# EAGLE board Micromuse 3D Design (EAGLE 9.7.0)
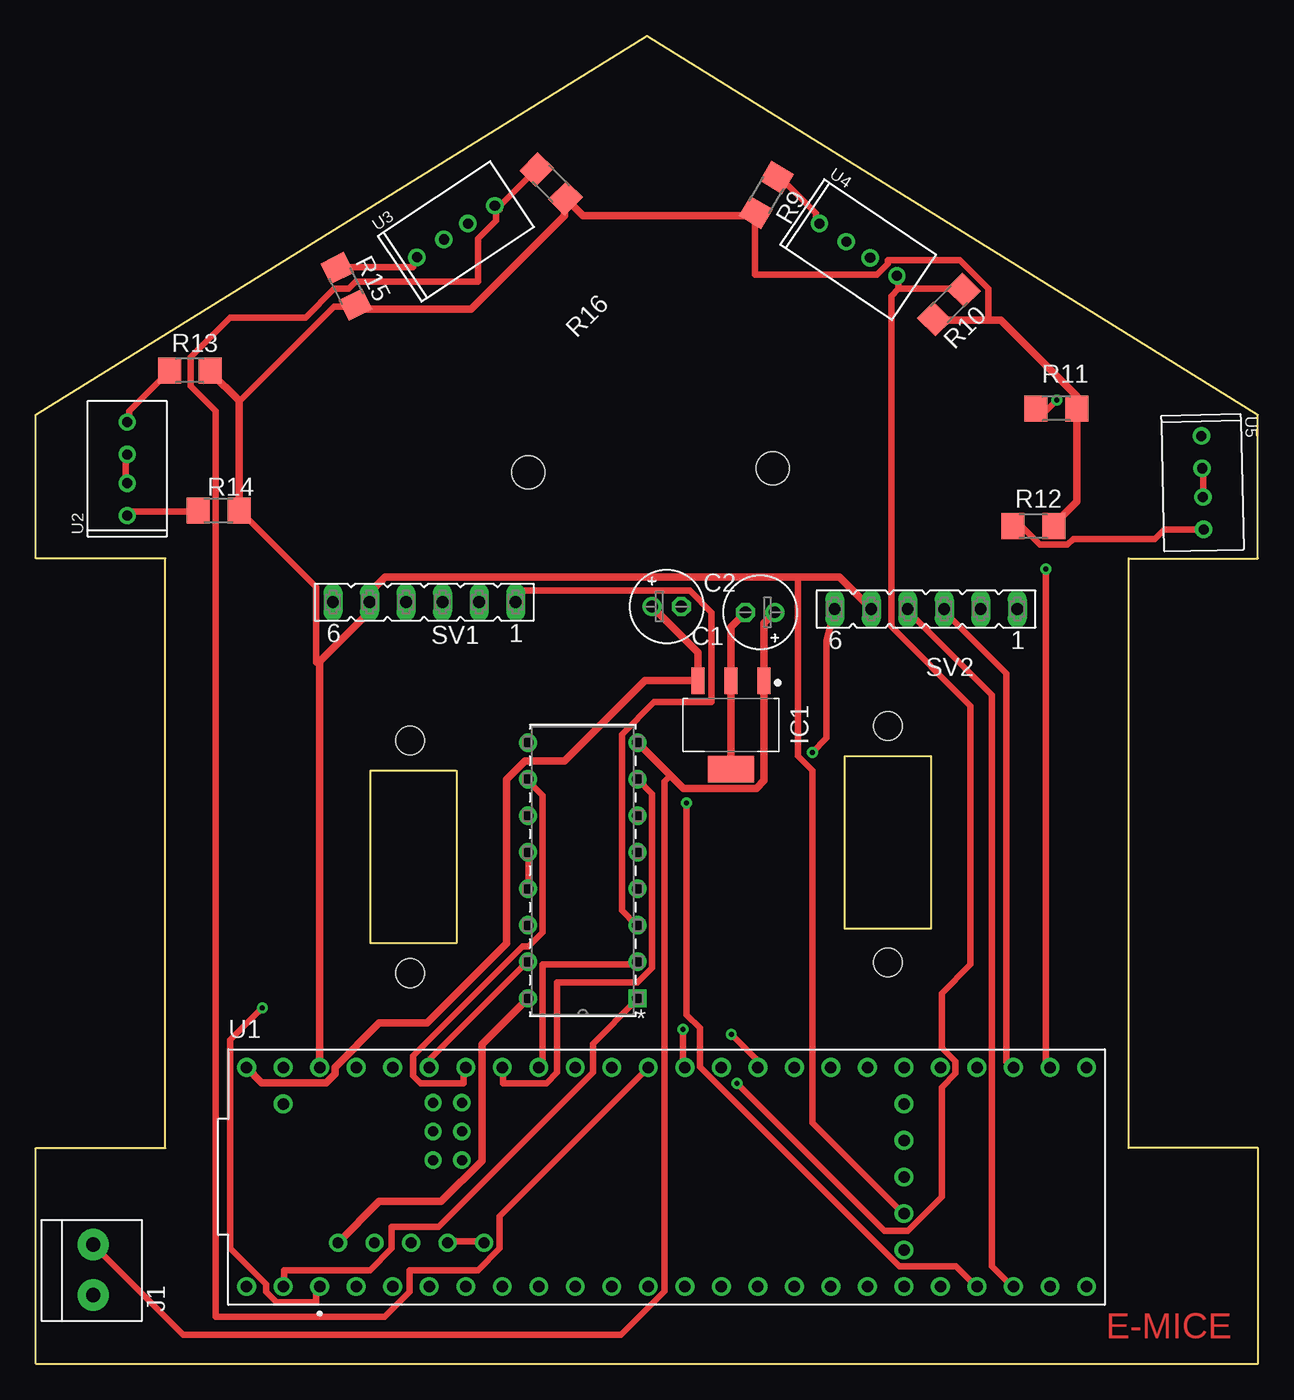
[diagram p0: board, top side]
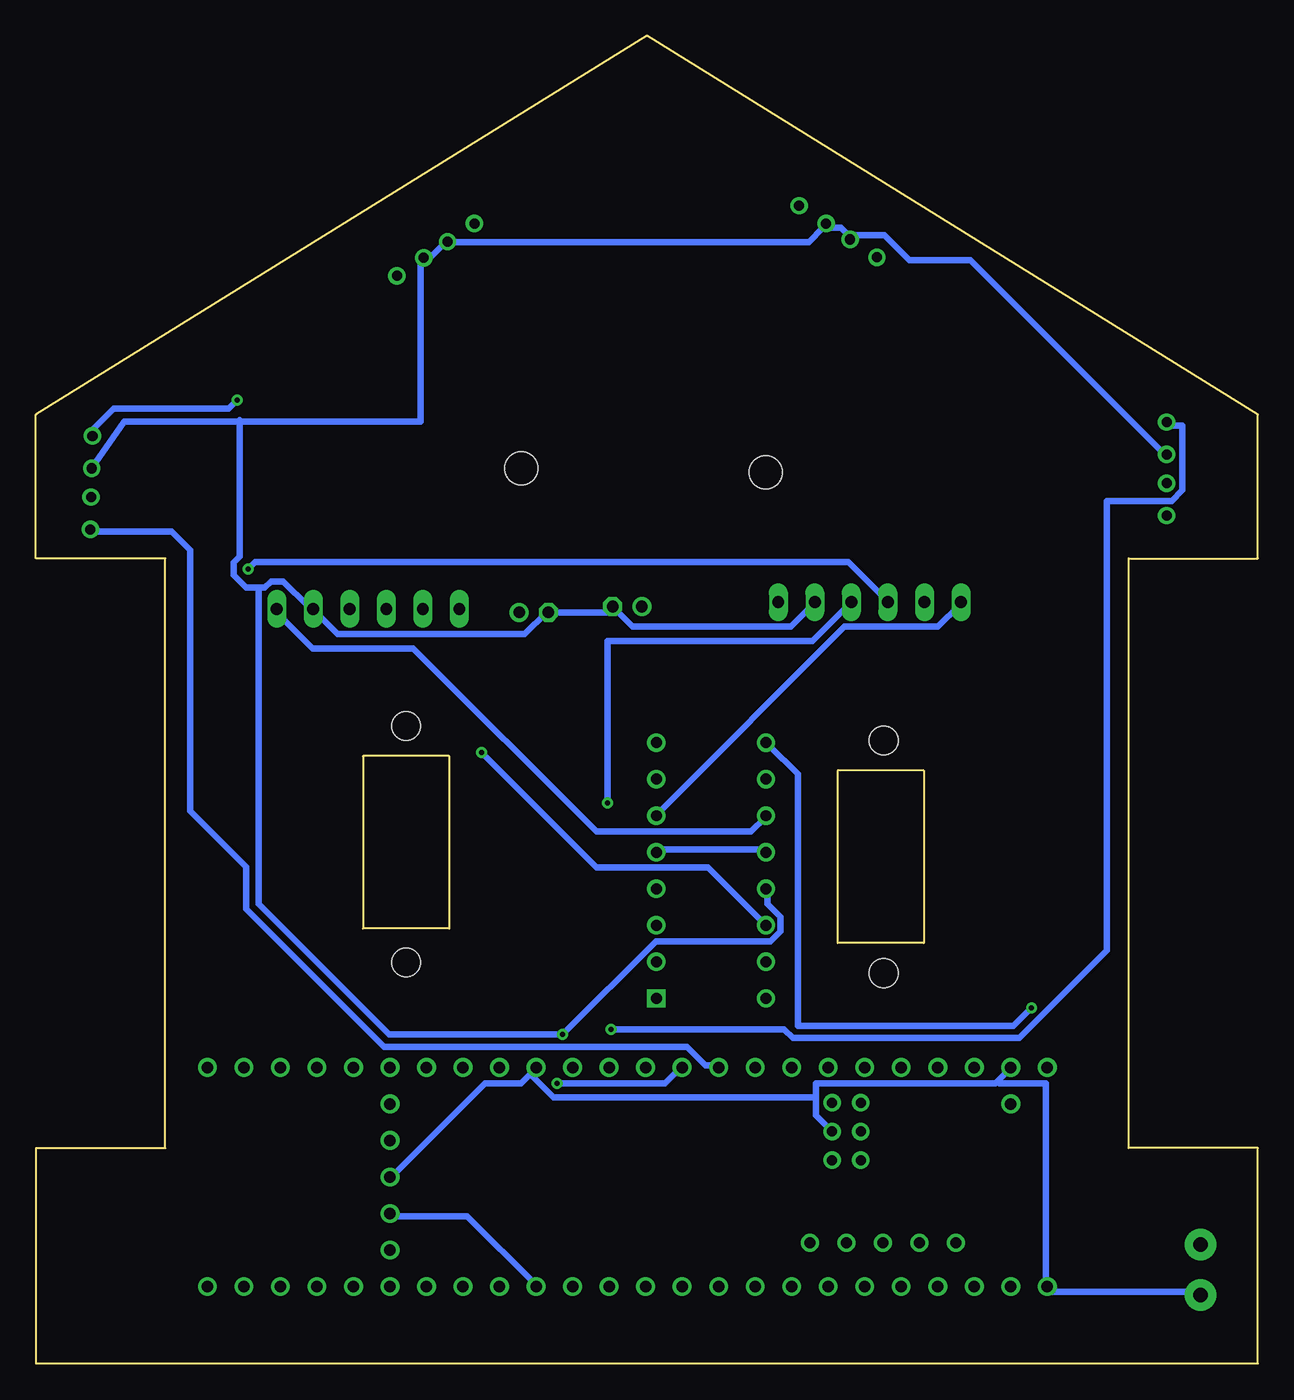
[diagram p1: board, bottom side, seen from below]

Size 85 x 92.34 mm. Coordinates in mm from the lower left corner, seen from the top.
Outline: 0,0 85,0 85,15 76,15 76,56 85,56 85,66 42.5,92.34 0,66 0,56 9,56 9,15 0,15 0,0
Outline: 23.25,41.25 23.25,29.25 29.25,29.25 29.25,41.25 23.25,41.25
Outline: 56.25,42.25 56.25,30.25 62.25,30.25 62.25,42.25 56.25,42.25
Copper layers (1*16): Top / Bottom
Stack-up Default Layer Stack: Top User Defined 0.035mm / Dielectric-1 User Defined 1.5mm / Bottom User Defined 0.035mm
Design rules: minimum drill size 0.35mm, minimum copper width 18mil, keepout clearance 0mil, drill distance 6mil, via restrict clearance 0mil, dimension clearance 40mil, restrict clearance 0mil, copper clearance wire_polygon to wire_polygon 16mil, copper clearance wire_polygon to pad_smd 6mil, copper clearance wire_polygon to via 6mil, copper clearance pad_smd to pad_smd 6mil, copper clearance pad_smd to via 6mil, copper clearance via to via 6mil, copper clearance smd to pad (same net) 6mil, copper clearance smd to via (same net) 6mil, copper clearance smd to smd (same net) 6mil
Holes 2 mm at 26.03,43.34 26.03,27.16 59.25,44.34 59.25,27.91
Holes 2.3 mm at 51.25,62.25 34.26,61.99

## Footprints (pad centres in the part's own frame; a part is rotated, then mirrored left to right if it is on the bottom)
E2-5 = drill 0.813 pad 1.27: + -1.016,0 | drill 0.813 pad 1.27 octagon: - 1.016,0
POWERDIP-16_STM = drill 0.762 pad 1.27 square: 1 0,0 | drill 0.762 pad 1.27: 2 0,-2.54; 3 0,-5.08; 4 0,-7.62; 5 0,-10.16; 6 0,-12.7; 7 0,-15.24; 8 0,-17.78; 9 7.62,-17.78; 10 7.62,-15.24; 11 7.62,-12.7; 12 7.62,-10.16; 13 7.62,-7.62; 14 7.62,-5.08; 15 7.62,-2.54; 16 7.62,0
SOT230P700X170-4 = smd 1.86 x 0.898: 1 -3.075,2.3; 2 -3.075,0; 3 -3.075,-2.3 | smd 1.86 x 3.189: 4 3.075,0
1X2-3.5MM = drill 1 pad 2.184: 1 1.8,0; 2 -1.7,0
R1206 = smd 1.6 x 1.803: 1 -1.422,0; 2 1.422,0
FE06 = drill 0.813 long: 1 -6.35,0; 2 -3.81,0; 3 -1.27,0; 4 1.27,0; 5 3.81,0; 6 6.35,0
MODULE_DEV-16771 = drill 0.8: 0 -26.67,-7.62; 1 -24.13,-7.62; 2 -21.59,-7.62; 3 -19.05,-7.62; 3.3V_1 6.35,-7.62; 3.3V_2 -24.13,7.62; 3.3V_3 16.51,-2.54; 4 -16.51,-7.62; 5 -13.97,-7.62; 6 -11.43,-7.62; 7 -8.89,-7.62; 8 -6.35,-7.62; 9 -3.81,-7.62; 10 -1.27,-7.62; 11 1.27,-7.62; 12 3.81,-7.62; 13 3.81,7.62; 14 1.27,7.62; 15 -1.27,7.62; 16 -3.81,7.62; 17 -6.35,7.62; 18 -8.89,7.62; 19 -11.43,7.62; 20 -13.97,7.62; 21 -16.51,7.62; 22 -19.05,7.62; 23 -21.59,7.62; 24 8.89,-7.62; 25 11.43,-7.62; 26 13.97,-7.62; 27 16.51,-7.62; 28 19.05,-7.62; 29 21.59,-7.62; 30 24.13,-7.62; 31 26.67,-7.62; 32 29.21,-7.62; 33 29.21,7.62; 34 26.67,7.62; 35 24.13,7.62; 36 21.59,7.62; 37 19.05,7.62; 38 16.51,7.62; 39 13.97,7.62; 40 11.43,7.62; 41 8.89,7.62; GND1 -29.21,-7.62; GND2 6.35,7.62; GND3 -26.67,7.62; GND4 16.51,0; ON/OFF 16.51,5.08; PROGRAM 16.51,2.54; VBAT 16.51,-5.08; VIN -29.21,7.62; VUSB -26.67,5.08 | drill 0.75: 5V -22.86,-4.57; D+ -17.78,-4.57; D- -20.32,-4.57; USB_GND1 -15.24,-4.57; USB_GND2 -12.7,-4.57 | drill 0.7: GND5 -14.24,3.17; LED -16.24,3.17; R+ -16.24,5.17; R- -14.24,5.17; T+ -14.24,1.17; T- -16.24,1.17
ST188-B = drill 0.7: A -3.25,0; C 3.25,0; E 1,0; K -1,0

## Placement (x,y rotation side)
C1  [E2-5]  50.37,52.25 180 top
C2  [E2-5]  43.87,52.65 0 top
CR1  L293DPOWERDIP-16_STM  [POWERDIP-16_STM]  41.85,25.41 180 top
IC1  LM7805_SOT223  [SOT230P700X170-4]  48.34,44.42 270 top
J1  1X2-3.5MM  [1X2-3.5MM]  3.98,6.58 270 top
R9  [R1206]  50.8,81.28 239.1 top
R10  [R1206]  63.5,73.66 225 top
R11  [R1206]  70.98,66.43 0 top
R12  [R1206]  69.37,58.24 0 top
R13  [R1206]  10.71,69.07 0 top
R14  [R1206]  12.7,59.32 0 top
R15  [R1206]  21.59,74.93 296.5 top
R16  [R1206]  35.83,82.05 315 top
SV1  [FE06]  27.01,52.96 180 top
SV2  [FE06]  61.91,52.48 180 top
U1  DEV-16771  [MODULE_DEV-16771]  43.87,12.98 0 top
U2  ST188B  [ST188-B]  6.35,62.23 90 top
U3  ST188B  [ST188-B]  29.21,78.74 33.6 top
U4  ST188B  [ST188-B]  57.19,77.47 326 top
U5  ST188B  [ST188-B]  81.14,61.27 271.3 top

## Library data of the parts
C1 C2 = rcl; SPICEPREFIX: C
CR1 = 2024-05-25_23-34-21_Library; COPYRIGHT: Copyright (C) 2024 Ultra Librarian. All rights reserved.; MANUFACTURER_PART_NUMBER: L293D; MFR_NAME: STMicroelectronics
IC1 = IC_Power-Management; CATEGORY: IC_Logic; DESCRIPTION: 5V Voltage Regulator; MANUFACTURER: Generic; MPN: Generic; SERIES: LM7805; SUB-CATEGORY: Voltage Regulator; TYPE: 5V
J1 = adafruit
R9-R16 = rcl; SPICEPREFIX: R
SV1 SV2 = con-lsta; OC_FARNELL: unknown; OC_NEWARK: unknown
U1 = DEV-16771; AVAILABILITY: In Stock; CHECK_PRICES: https://www.snapeda.com/parts/DEV-16771/SparkFun+Electronics/view-part/?ref=eda; DESCRIPTION: RT1062 Teensy 4.1 series ARM® Cortex®-M7 MPU Embedded Evaluation Board; MF: SparkFun Electronics; MP: DEV-16771; PACKAGE: None; PRICE: None; SNAPEDA_LINK: https://www.snapeda.com/parts/DEV-16771/SparkFun+Electronics/view-part/?ref=snap
U2-U5 = ST188; AVAILABILITY: In Stock; CHECK_PRICES: https://www.snapeda.com/parts/ST188/Stackpole+Electronics+Inc./view-part/?ref=eda; DESCRIPTION: RES SMD 887K OHM 0.5% 1/16W 0402; MF: Stackpole Electronics Inc.; MP: ST188; PACKAGE: None; PRICE: None; SNAPEDA_LINK: https://www.snapeda.com/parts/ST188/Stackpole+Electronics+Inc./view-part/?ref=snap

## Nets
3.3V: R9.2 R10.2 R11.2 R12.2 R13.2 R14.2 R15.2 R16.2 SV1.5 SV2.5 U1.3.3V_1 U1.3.3V_2 U1.3.3V_3
5V: CR1.16 U1.5V
C1: SV1.3 U1.29
C2: SV1.4 U1.34
C3: SV2.3 U1.35
C4: SV2.4 U1.30
ENABLE1: CR1.1 U1.0
ENABLE2: CR1.9 U1.1
GND: C1.- C2.- CR1.5 CR1.12 CR1.13 IC1.2 IC1.4 J1.1 SV1.2 SV2.2 U1.GND1 U1.GND2 U1.GND3 U1.GND4 U1.GND5 U2.E U2.K U3.E U3.K U4.E U4.K U5.E U5.K
IN_1: CR1.2 U1.18
IN_2: CR1.7 U1.19
IN_3: CR1.10 U1.20
IN_4: CR1.15 U1.21
IR_1: R13.1 U1.14 U2.C
IR_2: R16.1 U1.15 U3.C
IR_3: R10.1 U1.16 U4.C
IR_4: R12.1 U1.17 U5.C
MCU_POWER: C2.+ IC1.3 U1.VIN
MOTOR_POWER: C1.+ CR1.8 IC1.1 J1.2
N$1: R14.1 U2.A
N$2: R15.1 U3.A
N$3: R9.1 U4.A
N$4: R11.1 U5.A
N$8: CR1.4
OUT_1: CR1.3 SV1.1
OUT_2: CR1.6 SV1.6
OUT_3: CR1.11 SV2.1
OUT_4: CR1.14 SV2.6
USB_GND: U1.USB_GND1 U1.USB_GND2

## Tracks (layer width: path | path; a pad name or v marks a point on that pad's centre or on a via)
3.3V
  Top 0.457: R14.2 14.25,59.25 19.5,54 19.5,48.75 19.73,48.75 | 14.12,66.98 14.25,67 20.75,73.5 22,73.5 R15.2 | 53,54.69 53,42.25 54,41.25 54,16.75 60.25,10.5 U1.3.3V_3 | 66.25,72.58 66.25,74.75 64.25,76.75 59.25,76.75 59.25,76.5 58.5,75.75 50,75.75 50,79.75 R9.2
  Top 0.508: U1.3.3V_2 19.73,48.75 19.73,48.83 23.2,52.3 SV1.5 23.2,53.62 24.27,54.69 53,54.69 55.89,54.69 SV2.5 | R9.2 49.85,79.84 38.04,79.84 R16.2 | R10.2 62.57,72.58 66.25,72.58 67.11,72.58 72.41,67.28 R11.2 72.41,59.96 70.79,58.34 R12.2 | R16.2 36.76,80.97 36.76,79.84 30.27,73.34 22.54,73.34 R15.2 | R16.2 | R15.2 | R13.2 12.13,68.97 14.12,66.98 R14.2
  Bottom 0.457: U1.3.3V_1 50.25,5.5 55,10.25 60.25,10.25 U1.3.3V_3
5V
  Top 0.508: CR1.16 31.02,22.2 31.02,14.11 28.19,11.29 23.89,11.29 U1.5V
C1  (via drill 0.35)
  Top 0.457: v45.25,39 45.25,24.25 46.17,23.33 46.17,20.64 60.06,6.75 64,6.75 65.25,5.5 U1.29
  Bottom 0.457: v45.25,39 45.25,50.25 31,50.25 28.5,52.75 SV1.3
C2  (via drill 0.35)
  Top 0.457: v70.25,55.25 70.25,21 70.5,20.75 U1.34
  Bottom 0.457: v70.25,55.25 69.75,55.75 28.5,55.75 25.75,53 SV1.4
C3
  Top 0.457: U1.35 67.75,20.75 67.5,21 67.5,48 63.25,52.25 SV2.3
C4
  Top 0.457: U1.30 67.75,5.5 66.5,6.75 66.5,46.5 60.75,52.25 SV2.4
ENABLE1
  Top 0.457: CR1.1 41.75,25.25 38.75,22.25 38.75,20.25 28,9.5 24.75,9.5 24.75,8 23.25,6.5 17.25,6.5 17.25,5.5 U1.0
ENABLE2  (via drill 0.35)
  Top 0.457: v15.75,24.75 13.5,22.5 13.5,8 16,5.5 16,5 16.75,4.25 19.5,4.25 19.5,5.25 U1.1
  Bottom 0.457: v15.75,24.75 17,23.5 32,23.5 32,41 34,43 CR1.9
GND  (via drill 0.35)
  Top 0.457: U2.K 6.25,61.25 6.25,63 U2.E | CR1.13 34.25,33.25 34.25,35.5 CR1.12 | v48.36,22.89 50.52,20.73 U1.GND2 | U5.E 81.18,60.45 81.18,62.18 U5.K
  Top 0.508: C1.- 48.34,51.23 IC1.2 IC1.4
  Bottom 0.457: U1.GND4 60.25,13 53.75,19.5 51.25,19.5 50.25,20.5 U1.GND2 50.5,20 49,18.5 30.75,18.5 | J1.1 4,5 14.25,5 14.5,5.25 U1.GND1 14.75,5.5 14.75,19.5 18,19.5 18.12,19.62 | 30.75,18.5 30.75,19.5 18.25,19.5 18.12,19.62 | 30.75,18.5 30.75,17.25 29.75,16.25 U1.GND5 | 18.12,19.62 17.25,20.5 U1.GND3 | U2.E 6.5,63.25 20,76.75 24.25,76.75 26,78.5 28.25,78.5 U3.K 28.5,78.5 29,79 30,79 U3.E 30.25,79 31.25,78 56.25,78 U4.K 56.5,78 57.5,77 58,77 U4.E 58.25,76.75 58.25,65.5 70.81,65.5 | CR1.5 41.75,35.75 34.25,35.75 CR1.12 | SV1.2 31,52.75 32.5,51.25 43.5,51.25 44.75,52.5 C2.- 45,52.5 45.25,52.25 C1.- 49.5,52.25 51,50.75 64,50.75 65.5,52.25 SV2.2 66.06,52.68 67.79,54.41 68.66,54.41 69.09,53.98 69.52,53.98 | 70.81,65.5 78.86,65.5 U5.K | CR1.13 34.11,32.82 34.11,31.95 33.21,31.05 33.21,30.06 33.91,29.36 41.88,29.36 v48.36,22.89 60.43,22.89 69.52,31.98 69.52,53.98 | 70.81,65.5 70.81,56.13 71.25,55.7 71.25,54.84 70.38,53.98 69.52,53.98 | 70.81,65.63 70.81,65.5
IN_1
  Top 0.457: CR1.2 41.75,27.75 35.25,27.75 35.25,21 35,20.75 U1.18
IN_2
  Top 0.457: U1.19 32.5,20.5 32.5,19.5 35.5,19.5 36.25,20.25 36.25,26.5 41.84,26.5 42.86,27.52 42.86,39.63 CR1.7
IN_3
  Top 0.457: CR1.10 34.25,40.5 35.25,39.5 35.25,30 34.25,29 33.84,29 26.25,21.41 26.25,20 26.75,19.5 29.75,19.5 29.75,20.5 U1.20
IN_4
  Top 0.457: CR1.15 34,27.75 27.5,21.25 27.5,20.75 U1.21
IR_1  (via drill 0.35)
  Top 0.457: R13.1 9.25,69 6.5,66.25 6.5,65.5 U2.C | v45,23.25 45,20.75 U1.14
  Bottom 0.457: U2.C 6.25,65.25 5.25,65.25 5.25,60.75 6,60 10.5,60 10.5,28.75 16.61,22.64 32.36,22.64 32.97,23.25 v45,23.25
IR_2
  Top 0.457: R16.1 34.75,83 32.25,80.5 32.25,80.25 U3.C 32,80 32,79.5 30.75,78.25 30.75,75.25 22.25,75.25 21.75,74.75 20.75,74.75 18.75,72.75 13.5,72.75 10.75,70 10.75,68 12.5,66.25 12.5,3.25 24.25,3.25 26,5 26,6.5 30.75,6.5 32.25,8 32.25,10.25 42.5,20.5 U1.15
IR_3  (via drill 0.35)
  Top 0.457: 60,74.75 64.5,74.75 R10.1 | 60,74.75 60,75.5 U4.C | v48.75,19.5 59,9.25 60.65,9.25 63,11.6 63,19.22 63.95,20.17 63.95,21.02 63,21.97 63,25.75 65,27.75 65,45.75 59.5,51.25 59.5,74.25 60,74.75
  Bottom 0.457: v48.75,19.5 41.25,19.5 40.25,20.5 U1.16
IR_4
  Top 0.457: R12.1 68.55,58.24 69.83,56.96 71.75,56.96 72.14,57.35 77.82,57.35 78.48,58.02 U5.C
  Bottom 0.457: U1.17 37.57,20.73 38.43,20.73 39.73,22.02 60.79,22.02 70.38,31.62 70.38,34.54 74.27,38.43 74.27,56.57 75.56,57.86 81.18,57.86 U5.C
MCU_POWER
  Top 0.508: C2.+ 46.04,49.47 IC1.3 42.35,47.49 36.77,41.91 34.02,41.91 32.74,40.64 32.74,29.23 27.19,23.68 23.86,23.68 20.8,20.61 20.8,20.16 20.17,19.54 15.71,19.54 U1.VIN
MOTOR_POWER
  Top 0.457: J1.2 4,8.25 10.25,2 40.7,2 43.73,5.02 43.73,40.48 44.14,40.89
  Top 0.508: C1.+ 50.64,51.5 IC1.1 50.64,40.55 50.1,40.01 45.02,40.01 44.14,40.89 CR1.8
N$1
  Top 0.457: R14.1 11.25,59.25 6.5,59.25 6.5,59 U2.A
N$2
  Top 0.457: R15.1 21,76.25 26.25,76.25 26.25,77.25 U3.A
N$3
  Top 0.457: R9.1 51.75,82.5 54.25,80 54.25,79.5 U4.A
N$4  (via drill 0.35)
  Top 0.457: R11.1 70.2,66.2 v71,67
  Bottom 0.457: v71,67 71.59,66.41 79.59,66.41 81.07,64.93 U5.A
OUT_1
  Top 0.457: CR1.3 41.75,30.5 40.75,31.5 40.75,43.75 43,46 47,46 47,52.25 45.5,53.75 33.5,53.75 33.5,53 SV1.1
OUT_2
  Bottom 0.457: CR1.6 41.75,38.25 28.75,51.25 22.25,51.25 20.75,52.75 SV1.6
OUT_3
  Bottom 0.457: CR1.11 34.25,38 35.25,37 46,37 58.75,49.75 65.75,49.75 68.25,52.25 SV2.1
OUT_4  (via drill 0.35)
  Top 0.457: v54,42.5 55,43.5 55,50.25 SV2.6
  Bottom 0.457: v54,42.5 46,34.5 38.25,34.5 34.25,30.5 CR1.14
USB_GND
  Top 0.457: U1.USB_GND1 28.75,8.5 31,8.5 U1.USB_GND2

## Text on the board
Top: E-MICE